# EAGLE board jr-support_v2 (EAGLE 8.2.0), part 1 of 2
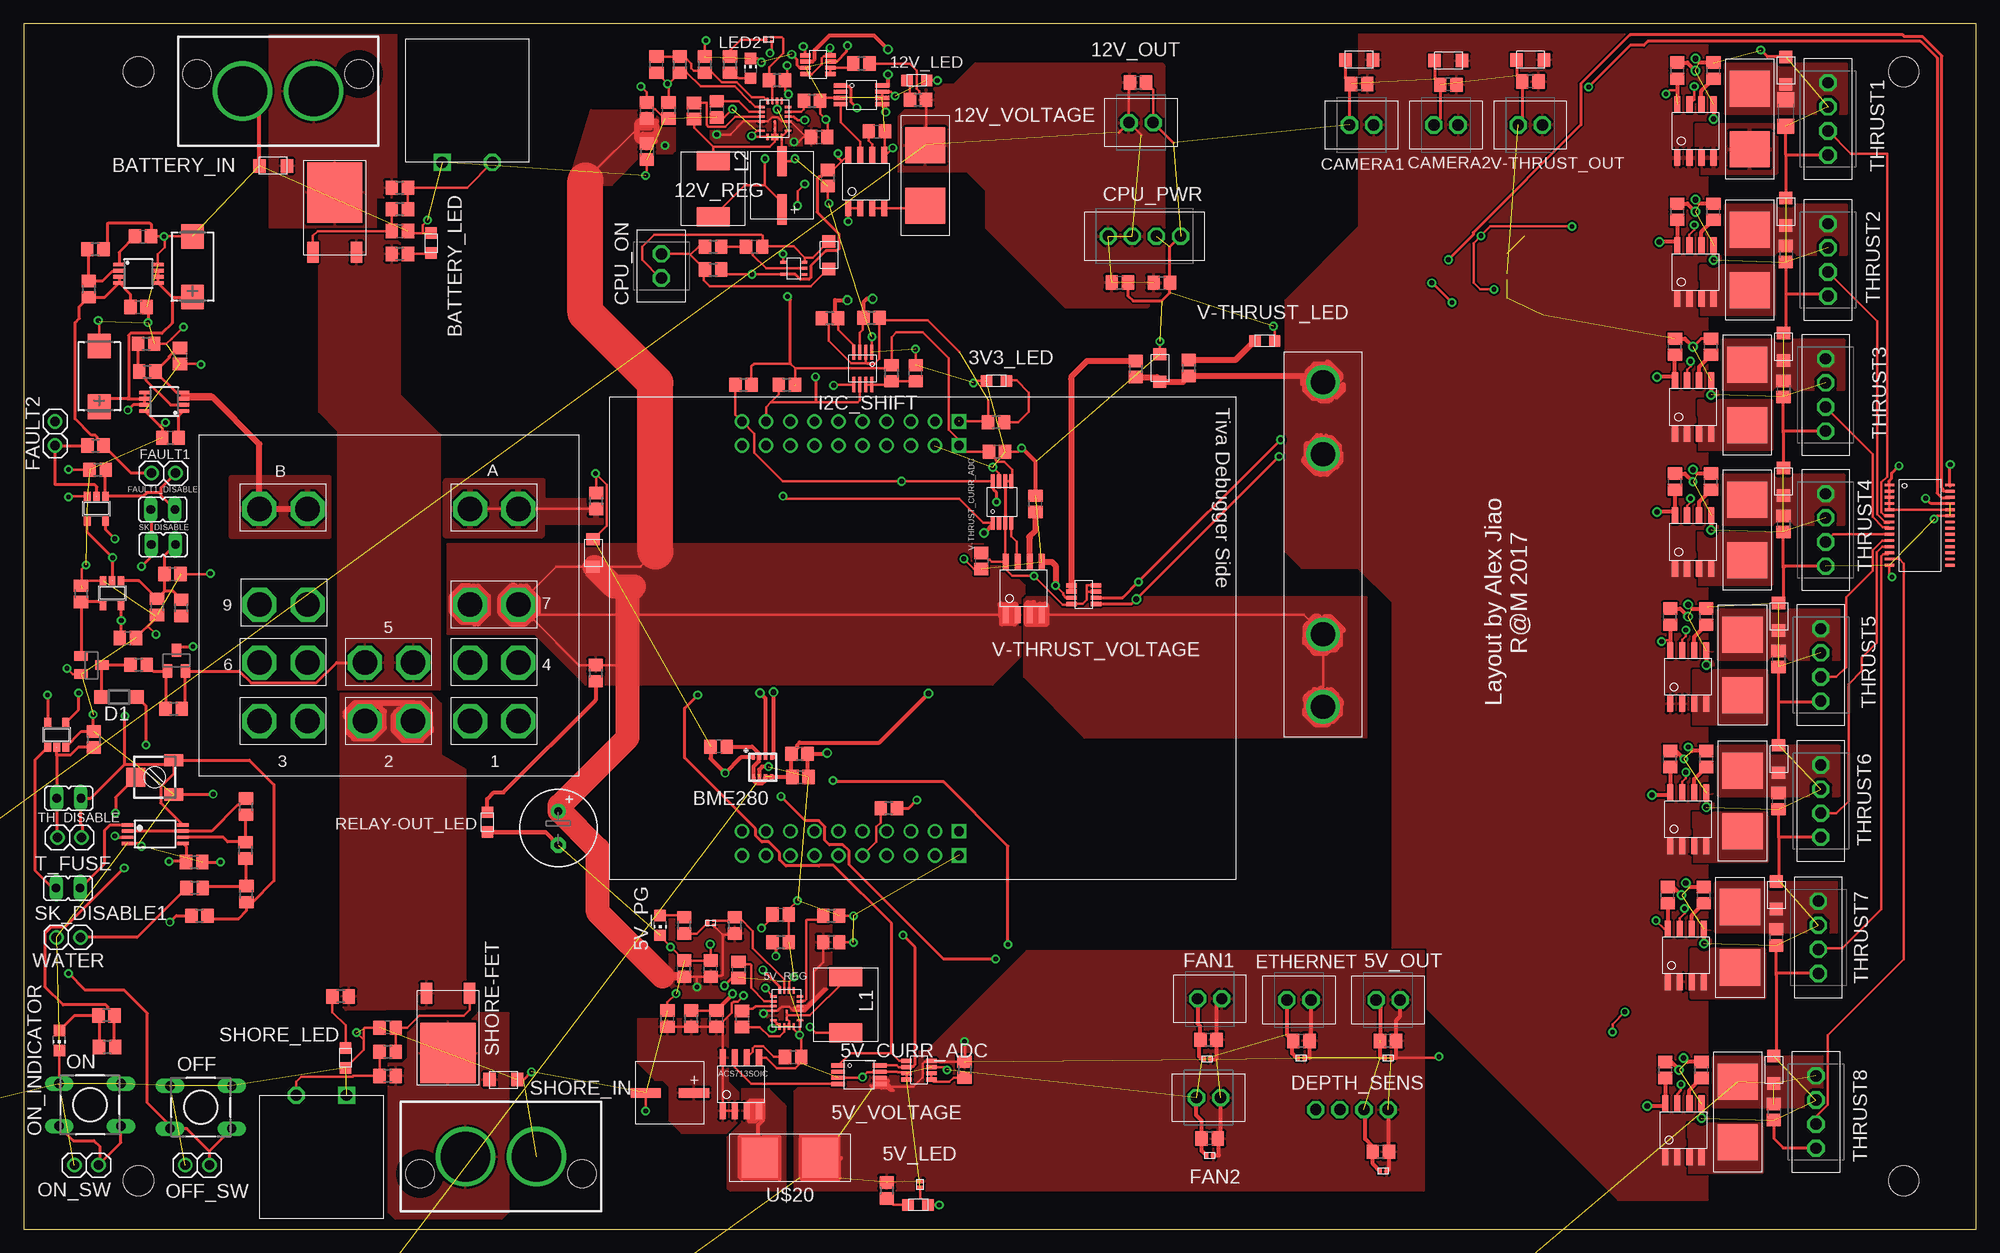
[diagram p0: board, top side]
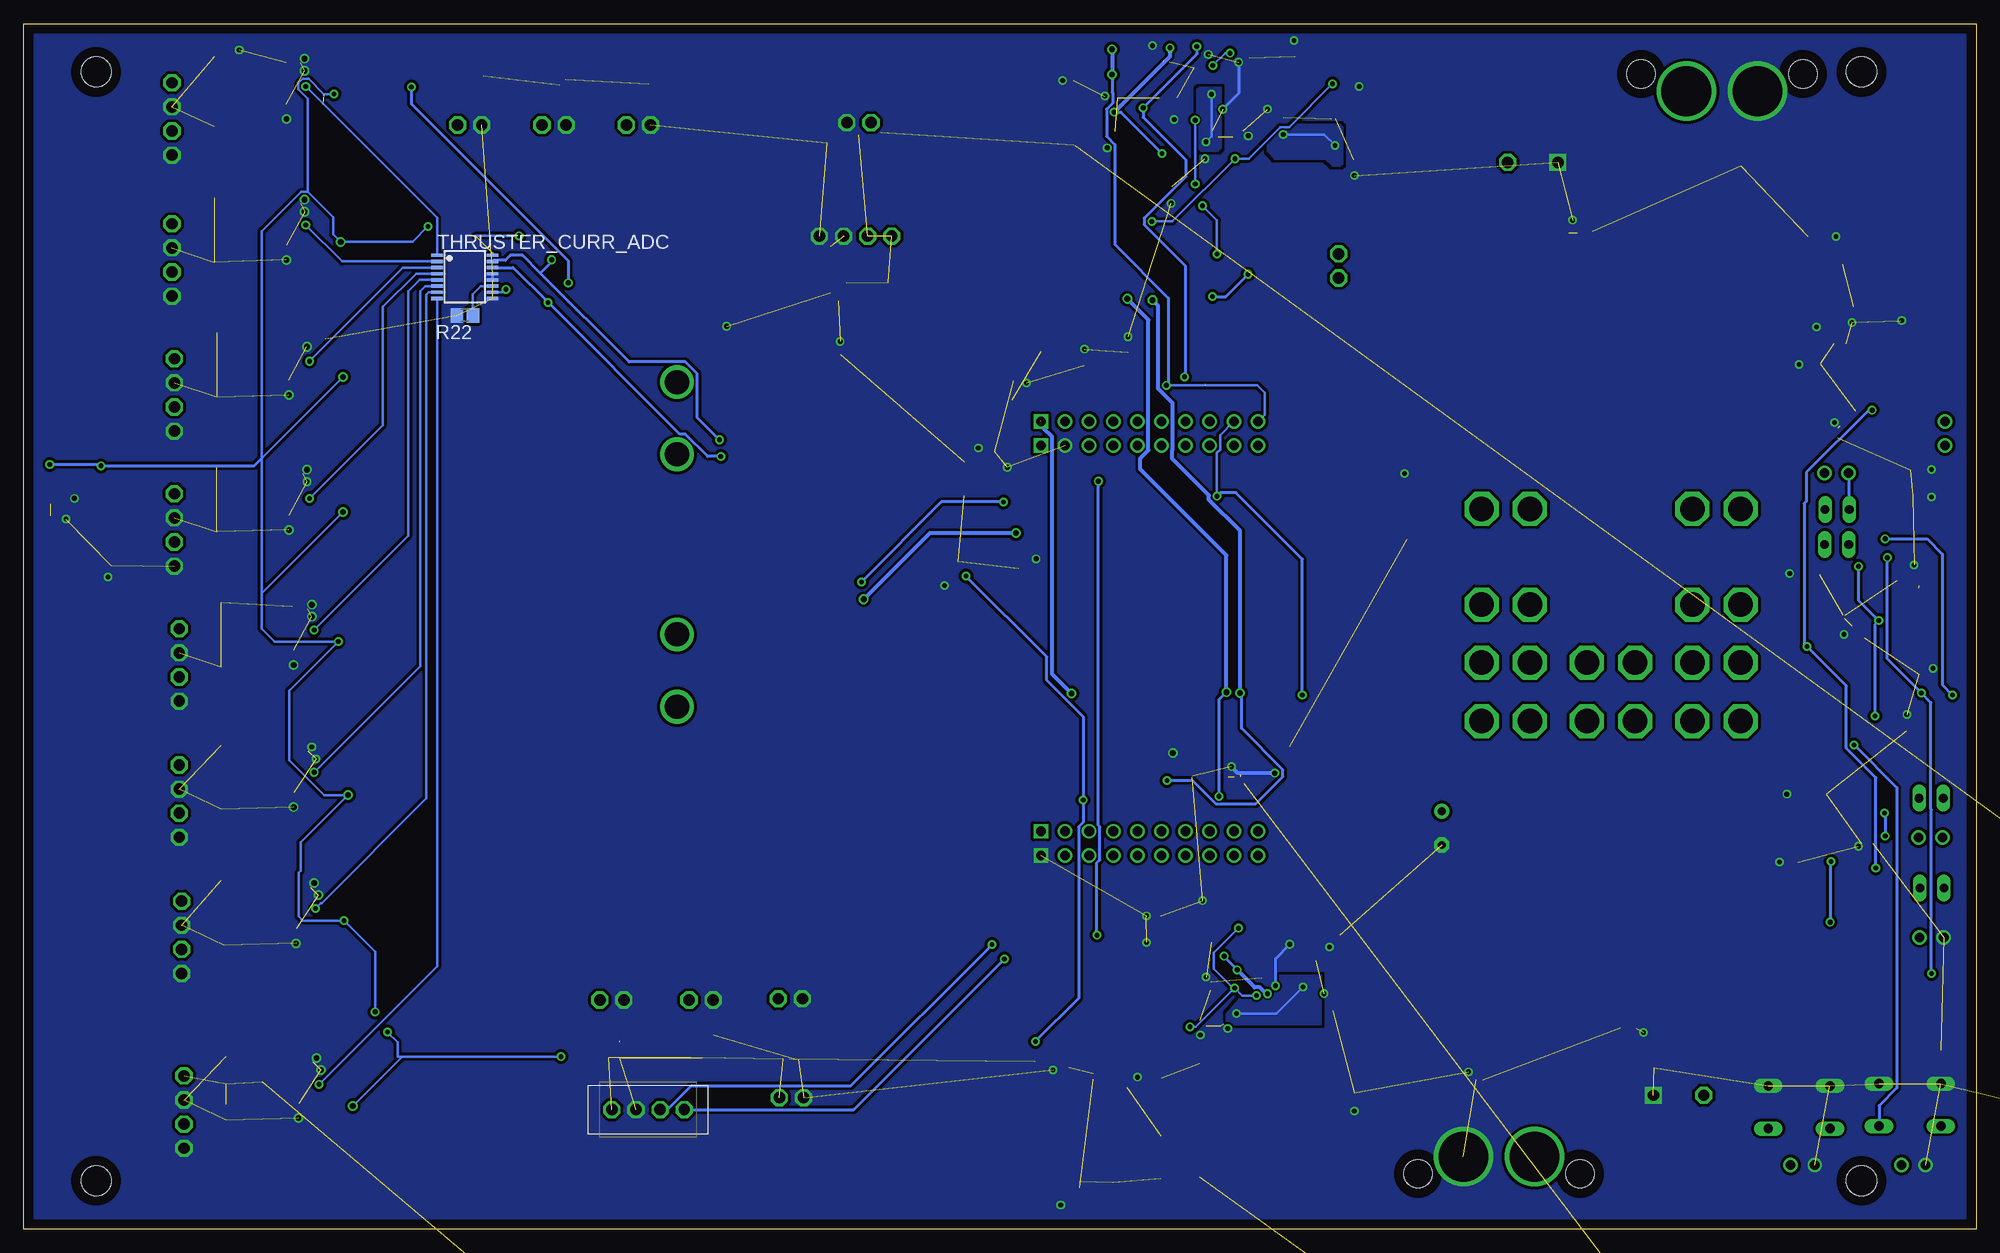
[diagram p1: board, bottom side, seen from below]

Size 205.74 x 127 mm. Coordinates in mm from the lower left corner, seen from the top.
Outline: 0,0 205.74,0 205.74,127 0,127 0,0
Copper layers (1*16): Top 0.035mm / dielectric 1.5mm / Bottom 0.035mm
Design rules "default": minimum track width 10mil, minimum drill 24mil, track to track 8mil, track to pad 8mil, pad to pad 8mil, via to via 8mil, smd to smd 8mil, copper to edge 40mil, drill to drill 8mil, minimum pad ring 10mil, minimum via ring 8mil, stop-mask expansion 4mil, vias tented up to drill 0mil, thermal gap 10mil
Holes 3.17 mm at 12.09,121.92 198.12,5.08 12.09,5.08 198.12,121.92

## Footprints (pad centres in the part's own frame; a part is rotated, then mirrored left to right if it is on the bottom)
0805 = smd 1.2 x 1.2: P$1 -1.05,0; P$2 1.05,0
VSSOP-8 = smd 0.45 x 1.45: P$1 -0.975,-2.2; P$2 -0.325,-2.2; P$3 0.325,-2.2; P$4 0.975,-2.2; P$5 0.975,2.2; P$6 0.325,2.2; P$7 -0.325,2.2; P$8 -0.975,2.2
KK254_VERT_2PIN = drill 1.2 octagon: P$1 1.27,0; P$2 -1.27,0
CHIP-LED0805 = smd 1.2 x 1.2: A 0,-1.05; C 0,1.05
QFN18-3X4 = smd 0.25 x 0.7: 1 1.25,1.4; 2 0.75,1.4; 3 0.25,1.4; 4 -0.25,1.4; 6 -1.25,1.4; 11 -1.25,-1.4; 13 -0.25,-1.4; 14 0.25,-1.4; 15 0.75,-1.4; 16 1.25,-1.4 | smd 0.7 x 0.25: 7 -1.9,0.75; 8 -1.9,0.25; 9 -1.9,-0.25; 10 -1.9,-0.75; 17 1.9,-0.75; 18 1.9,-0.25; 19 1.9,0.25; 20 1.9,0.75 | smd 0.4 x 0.22: 21 -1.075,0 | smd 0.356 x 0.22: 22 -0.305,0
SOT-23-8 = smd 0.45 x 1.1: P$1 -0.975,-1.3; P$2 -0.325,-1.3; P$3 0.325,-1.3; P$4 0.975,-1.3; P$5 0.975,1.3; P$6 0.325,1.3; P$7 -0.325,1.3; P$8 -0.975,1.3
SUPERSABRE_2CIRCUIT = drill 5.25: P$1 -3.747,0; P$2 3.747,0 | hole 2.997: -8.534,-1.803; 8.534,-1.803
BME280_LGA = smd 0.5 x 0.35: P$1 1.025,0.975; P$2 1.025,0.325; P$3 1.025,-0.325; P$4 1.025,-0.975; P$5 -1.025,-0.975; P$6 -1.025,-0.325; P$7 -1.025,0.325; P$8 -1.025,0.975
C0805 = smd 1.3 x 1.5: 1 -0.85,0; 2 0.85,0
C-F80 = smd 1 x 3.2: P$1 0,2.55; P$2 0,-2.53
C1206 = smd 1.6 x 1.8: 1 -1.4,0; 2 1.4,0
E3,5-8 = drill 0.813 pad 1.6: + -1.778,0 | drill 0.813 pad 1.6 octagon: - 1.778,0
CT7343 = smd 2.6 x 2.4: + 3.2,0; - -3.2,0
KK254_VERT_4PIN = drill 1.2 octagon: P$1 3.81,0; P$2 1.27,0; P$3 -1.27,0; P$4 -3.81,0
SOD123 = smd 1.4 x 1.4: A 1.9,0; C -1.9,0
1X02 = drill 1.016: 1 -1.27,0; 2 1.27,0
JP1 = drill 0.914 long: 1 0,-1.27; 2 0,1.27
SM8 = smd 0.3 x 1.6: P$1 -0.975,-1.7; P$2 -0.34,-1.7; P$3 0.295,-1.7; P$4 0.93,-1.7; P$5 0.93,1.7; P$6 0.295,1.7; P$7 -0.34,1.7; P$8 -0.975,1.7
SOT23-5 = smd 0.69 x 0.99: 1 -0.95,-1.29; 2 0,-1.29; 3 0.95,-1.29; 4 0.95,1.3; 5 -0.95,1.3
TSSOP8 = smd 1.2 x 0.35: 1 -2.925,0.975; 2 -2.925,0.325; 3 -2.925,-0.325; 4 -2.925,-0.975; 5 2.925,-0.975; 6 2.925,-0.325; 7 2.925,0.325; 8 2.925,0.975
L0740 = smd 2 x 3.5: P$1 -2.95,0; P$2 2.95,0
SOT23 = smd 1 x 1.4: 1 -0.95,-1.1; 2 0.95,-1.1; 3 0,1.1
DTS-6 = drill 1 long: 1 -3.25,2.25; 2 3.25,2.25; 3 -3.25,-2.25; 4 3.25,-2.25
R0805 = smd 1.3 x 1.5: 1 -0.85,0; 2 0.85,0
RTRIM3314J = smd 1.3 x 2: 1 -1.8,-2; 3 1.8,-2 | smd 2 x 2: 2 0,2
TO252-3 = smd 1.2 x 2.2: 1 -2.28,-6.3; 3 2.28,-6.3 | smd 5.8 x 6.4: TAB 0,0
TSSOP16 = smd 0.35 x 1.2: 1 -2.275,-2.925; 2 -1.625,-2.925; 3 -0.975,-2.925; 4 -0.325,-2.925; 5 0.325,-2.925; 6 0.975,-2.925; 7 1.625,-2.925; 8 2.275,-2.925; 9 2.275,2.925; 10 1.625,2.925; 11 0.975,2.925; 12 0.325,2.925; 13 -0.325,2.925; 14 -0.975,2.925; 15 -1.625,2.925; 16 -2.275,2.925
SOD-323 = smd 0.63 x 0.83: P$1 -1.115,0; P$2 1.115,0
TSSOP-28_4MM = smd 1 x 0.3: 1 -3.2,4.225; 2 -3.2,3.575; 3 -3.2,2.925; 4 -3.2,2.275; 5 -3.2,1.625; 6 -3.2,0.975; 7 -3.2,0.325; 8 -3.2,-0.325; 9 -3.2,-0.975; 10 -3.2,-1.625; 11 -3.2,-2.275; 12 -3.2,-2.925; 13 -3.2,-3.575; 14 -3.2,-4.225; 15 3.2,-4.225; 16 3.2,-3.575; 17 3.2,-2.925; 18 3.2,-2.275; 19 3.2,-1.625; 20 3.2,-0.975; 21 3.2,-0.325; 22 3.2,0.325; 23 3.2,0.975; 24 3.2,1.625; 25 3.2,2.275; 26 3.2,2.925; 27 3.2,3.575; 28 3.2,4.225
MSOP8 = smd 0.4 x 1.2: 1 -0.975,-2.05; 2 -0.325,-2.05; 3 0.325,-2.05; 4 0.975,-2.05; 5 0.975,2.05; 6 0.325,2.05; 7 -0.325,2.05; 8 -0.975,2.05
AP02002 = smd 0.4 x 0.25: P$1 -0.35,0.225; P$2 -0.35,-0.225 | smd 0.4 x 0.7: P$3 0.35,0
ACS713-SOIC = smd 0.65 x 1.75: P$1 -1.905,-2.8; P$2 -0.635,-2.8; P$3 0.635,-2.8; P$4 1.905,-2.8; P$5 1.905,2.8; P$6 0.635,2.8; P$7 -0.635,2.8; P$8 -1.905,2.8
TIVA-C_EVAL = drill 1.016 square: 1-1 -22.86,3.81; 2-1 22.86,3.81; 3-1 -20.32,3.81; 4-1 20.32,3.81 | drill 1.016: 1-2 -22.86,1.27; 1-3 -22.86,-1.27; 1-4 -22.86,-3.81; 1-5 -22.86,-6.35; 1-6 -22.86,-8.89; 1-7 -22.86,-11.43; 1-8 -22.86,-13.97; 1-9 -22.86,-16.51; 1-10 -22.86,-19.05; 2-2 22.86,1.27; 2-3 22.86,-1.27; 2-4 22.86,-3.81; 2-5 22.86,-6.35; 2-6 22.86,-8.89; 2-7 22.86,-11.43; 2-8 22.86,-13.97; 2-9 22.86,-16.51; 2-10 22.86,-19.05; 3-2 -20.32,1.27; 3-3 -20.32,-1.27; 3-4 -20.32,-3.81; 3-5 -20.32,-6.35; 3-6 -20.32,-8.89; 3-7 -20.32,-11.43; 3-8 -20.32,-13.97; 3-9 -20.32,-16.51; 3-10 -20.32,-19.05; 4-2 20.32,1.27; 4-3 20.32,-1.27; 4-4 20.32,-3.81; 4-5 20.32,-6.35; 4-6 20.32,-8.89; 4-7 20.32,-11.43; 4-8 20.32,-13.97; 4-9 20.32,-16.51; 4-10 20.32,-19.05
1.25"_FUSECLIPS = drill 2.54: P$1 -17.107,0; P$2 -9.487,0; P$3 9.487,0; P$4 17.107,0
154-OMNI-BLOK = smd 3.81 x 4.242: P$1 -3.188,0; P$2 3.188,0
DO-219AB = smd 1.3 x 1.4: P$1 -1.45,0; P$2 1.45,0
KUHP_6.35MM-QUICK-CONNECT = drill 2.57 octagon: 1A -13.64,6.17; 1B -8.56,6.17; 2A -2.54,6.17; 2B 2.54,6.17; 3A 8.56,6.17; 3B 13.64,6.17; 4A -13.64,0; 4B -8.56,0; 5A -2.54,0; 5B 2.54,0; 6A 8.56,0; 6B 13.64,0; 7A -13.64,-6.1; 7B -8.56,-6.1; 9A 8.56,-6.1; 9B 13.64,-6.1; AA -13.64,-16.18; AB -8.56,-16.18; BA 8.56,-16.18; BB 13.64,-16.18
TSSOP5 = smd 0.3 x 0.6: P$1 -0.65,-1.125; P$2 0,-1.125; P$3 0.65,-1.125; P$4 0.65,1.125; P$5 -0.62,1.125
X1-DFN1006-2 = smd 0.4 x 0.7: P$1 -0.35,0; P$2 0.35,0
GPTS203211B = drill 1.2 square: P$1 0,-2.65 | drill 1.2 octagon: P$2 0,2.65

## Placement (x,y rotation side)
3V3_LED  [0805]  102.49,89.37 180 top
5V_CURR_ADC  ADC121C021  [VSSOP-8]  88.01,16.26 270 top
5V_LED  [0805]  94.23,2.54 0 top
5V_OUT  5V_OUT  [KK254_VERT_2PIN]  143.76,24.13 0 top
5V_PG  [CHIP-LED0805]  67.06,32 180 top
5V_REG  LT8640  [QFN18-3X4]  80.39,23.24 90 top
5V_VOLTAGE  INA219SOT23  [SOT-23-8]  94.33,16.73 90 top
12V_CURR_ADC  ADC121C021  [VSSOP-8]  88.27,119.51 270 top
12V_LED  [0805]  94.11,121.03 0 top
12V_OUT  12V_OUT  [KK254_VERT_2PIN]  117.73,116.59 180 top
12V_REG  LT8640  [QFN18-3X4]  79.12,116.97 90 top
12V_VOLTAGE  INA219SOT23  [SOT-23-8]  83.69,122.68 90 top
BATTERY_IN  2_SUPERSABRE  [SUPERSABRE_2CIRCUIT]  26.8,119.89 180 top
BATTERY_LED  [0805]  42.93,103.89 90 top
BME280  BME280  [BME280_LGA]  77.85,48.67 90 top
C1  0.1u  [C0805]  84.71,110.74 270 top
C2  0.1u  [C0805]  79.76,33.15 0 top
C3  47n  [C0805]  81.08,18.13 0 top
C4  1u  [C0805]  65.66,113.54 270 top
C5  0.1u  [C0805]  174.24,122.05 90 top
C6  47n  [C0805]  178.05,122.05 90 top
C7  1u  [C0805]  -137.16,-482.6 0 top  (outside the outline)
C8  0.1u  [C0805]  174.24,107.19 90 top
C9  47n  [C0805]  178.05,107.19 90 top
C10  10u  [C0805]  185.67,102.74 270 top
C11  0.1u  [C0805]  173.99,92.96 90 top
C12  47n  [C0805]  177.8,92.96 90 top
C13  10u  [C0805]  185.42,88.52 270 top
C14  0.1u  [C0805]  173.99,78.74 90 top
C15  47n  [C0805]  177.8,78.74 90 top
C16  10u  [C0805]  185.42,74.3 270 top
C17  0.1u  [C0805]  173.48,64.52 90 top
C18  47n  [C0805]  177.29,64.52 90 top
C19  0.1u  [C0805]  100.9,70.4 270 top
C20  47n  [C0805]  106.62,76.41 90 top
C21  10u  [C0805]  184.91,60.07 270 top
C22  0.1u  [C0805]  173.48,49.53 90 top
C23  100p  [C0805]  93.98,90.17 90 top
C24  100n  [C0805]  81.84,47.62 0 top
C25  100n  [C0805]  81.74,50.09 0 top
C26  100n  [C0805]  73.23,50.83 180 top
C27  10u  [C0805]  65.66,117.86 90 top
C28  15p  [C0805]  66.67,122.68 90 top
C29  47n  [C0805]  177.29,49.53 90 top
C30  10u  [C0805]  184.91,45.08 270 top
C31  47n  [C0805]  89.9,115.66 0 top
C32  1u  [C0805]  76.96,103.5 0 top
C33  0.1u  [C0805]  173.23,35.18 90 top
C34  1u  [C0805]  83.82,115.06 0 top
C35  22u  [C0805]  67.94,117.86 270 top
C36  220u  [C-F80]  79.88,109.98 180 top
C37  47n  [C0805]  177.04,35.18 90 top
C38  1u  [C0805]  72.39,27.43 90 top
C39  1u  [C0805]  73.02,117.98 270 top
C40  10u  [C0805]  69.6,27.43 90 top
C41  0.1u  [C0805]  70.63,117.81 270 top
C42  15p  [C0805]  72.99,22.17 90 top
C43  [C0805]  143,8.13 180 top
C44  1n  [C0805]  119.93,99.69 0 top
C45  1n  [C0805]  115.5,99.74 0 top
C46  [C0805]  140.72,120.65 180 top
C47  [C0805]  150.11,120.57 180 top
C48  [C0805]  134.62,19.81 180 top
C49  [C0805]  158.75,120.9 180 top
C50  [C0805]  117.4,120.81 0 top
C51  [C0805]  143.76,19.81 180 top
C52  0.1u  [C0805]  -137.16,-254 0 top  (outside the outline)
C53  4.7u  [C0805]  102.55,81.91 0 top
C54  10u  [C1206]  185.67,117.6 270 top
C55  10u  [C0805]  184.66,30.73 270 top
C56  0.1u  [C0805]  172.97,16.76 90 top
C57  47n  [C0805]  176.78,16.76 90 top
C58  10u  [C0805]  184.4,12.32 270 top
C59  100u  [E3,5-8]  56.33,42.24 270 top
C60  1u  [C0805]  85.09,30.23 0 top
C61  22u  [C0805]  67.82,22.17 90 top
C62  220u  [C-F80]  68.07,14.35 270 top
C63  1u  [C0805]  75.31,27.3 270 top
C64  2.2u  [C0805]  39.62,105.16 0 top
C65  0.1u  [C0805]  75.69,22.13 270 top
C66  2.2u  [C0805]  38.35,21.21 180 top
C67  [C0805]  124.84,19.94 180 top
C68  [C0805]  124.97,9.52 180 top
C69  100nF  [C0805]  10.97,62.28 0 top
C70  10nF  [C0805]  12.57,104.6 0 top
C71  100nF  [C0805]  12.09,97.16 0 top
C72  T491D475K050AT  [CT7343]  17.78,101.4 270 top
C73  100nF  [C0805]  15.67,69.01 0 top
C74  10nF  [C0805]  15.44,83.36 180 top
C75  100nF  [C0805]  16.46,92 270 top
C76  T491D475K050AT  [CT7343]  7.95,89.84 270 top
C77  0.1u  [C0805]  -137.16,-50.8 0 top  (outside the outline)
C78  4.7u  [C0805]  -137.16,-76.2 0 top  (outside the outline)
C79  0.1u  [C0805]  -137.16,-101.6 0 top  (outside the outline)
C80  4.7u  [C0805]  -137.16,-127 0 top  (outside the outline)
C81  0.1u  [C0805]  -137.16,-152.4 0 top  (outside the outline)
C82  1n  [C0805]  -137.16,-177.8 0 top  (outside the outline)
C83  4.7u  [C0805]  -137.16,-203.2 0 top  (outside the outline)
C84  0.1u  [C0805]  -111.76,-203.2 0 top  (outside the outline)
C85  1n  [C0805]  -137.16,-228.6 0 top  (outside the outline)
C86  0.1u  [C0805]  -137.16,-279.4 0 top  (outside the outline)
C87  0.1u  [C0805]  -137.16,-304.8 0 top  (outside the outline)
C88  0.1u  [C0805]  -137.16,-330.2 0 top  (outside the outline)
C89  0.1u  [C0805]  -137.16,-355.6 0 top  (outside the outline)
C90  0.1u  [C0805]  -137.16,-381 0 top  (outside the outline)
C91  0.1u  [C0805]  -137.16,-406.4 0 top  (outside the outline)
C92  0.1u  [C0805]  -137.16,-431.8 0 top  (outside the outline)
C93  1u  [C0805]  -137.16,-457.2 0 top  (outside the outline)
C94  1u  [C0805]  -137.16,-508 0 top  (outside the outline)
C95  1u  [C0805]  -137.16,-533.4 0 top  (outside the outline)
C96  1u  [C0805]  -137.16,-558.8 0 top  (outside the outline)
C97  1u  [C0805]  -137.16,-584.2 0 top  (outside the outline)
C98  1u  [C0805]  -137.16,-609.6 0 top  (outside the outline)
C99  1u  [C0805]  -137.16,-635 0 top  (outside the outline)
C100  1u  [C0805]  -137.16,-660.4 0 top  (outside the outline)
C101  1u  [C0805]  -137.16,-685.8 0 top  (outside the outline)
C102  1u  [C0805]  -137.16,-711.2 0 top  (outside the outline)
CAMERA1  KK254_VERT_2PIN22-29-2021  [KK254_VERT_2PIN]  140.97,116.33 0 top
CAMERA2  KK254_VERT_2PIN22-29-2021  [KK254_VERT_2PIN]  149.86,116.33 0 top
CPU_ON  KK254_VERT_2PIN22-29-2021  [KK254_VERT_2PIN]  67.18,101.47 90 top
CPU_PWR  CPU PWR  [KK254_VERT_4PIN]  118.09,104.62 0 top
D1  MMSD4148  [SOD123]  10.03,56.06 180 top
DEPTH_SENS  Depth Sensor  [KK254_VERT_4PIN]  139.95,12.57 0 bottom
ETHERNET  KK254_VERT_2PIN22-29-2021  [KK254_VERT_2PIN]  134.37,24.13 0 top
FAN1  KK254_VERT_2PIN22-29-2021  [KK254_VERT_2PIN]  124.97,24.26 0 top
FAN2  Ethernet switch pwr  [KK254_VERT_2PIN]  124.84,13.84 0 top
FAULT1  [1X02]  14.73,79.65 0 top
FAULT1_DISABLE  [JP1]  14.66,75.82 90 top
FAULT2  [1X02]  3.3,83.82 90 top
I2C_SHIFT  [SM8]  88.39,90.68 180 top
IC1  74LVC1G08DBV  [SOT23-5]  3.48,52.07 0 top
IC2  TLC2272PW  [TSSOP8]  13.84,41.61 0 top
IC3  74LVC1G08DBV  [SOT23-5]  9.32,67.01 180 top
IC4  74LVC1G08DBV  [SOT23-5]  7.65,75.9 180 top
L1  2.2u  [L0740]  86.61,23.62 270 top
L2  2.2u  [L0740]  72.64,109.6 270 top
LED2  FASTCHG  [CHIP-LED0805]  76.58,122.3 0 top
N1  2N7002  [SOT23]  7.14,59.41 270 top
OFF  DTS-6  [DTS-6]  18.67,12.83 0 top
OFF_SW  [1X02]  18.29,6.73 180 top
ON  DTS-6  [DTS-6]  6.98,13.08 0 top
ON_INDICATOR  Green  [CHIP-LED0805]  3.76,19.86 180 top
ON_SW  [1X02]  6.6,6.73 180 top
Q1  FDN5618P  [SOT23]  16.08,59.89 0 top
R1  10k  [R0805]  91.16,44.33 0 top
R2  1.2k  [R0805]  69.6,32 270 top
R3  50k  [R0805]  74.93,32 270 top
R7  4.7k  [R0805]  75.83,88.97 0 top
R8  4.7k  [R0805]  80.41,88.97 0 top
R10  4.2k  [R0805]  84.94,95.97 180 top
R11  4.2k  [R0805]  89.33,96.03 0 top
R12  200k  [R0805]  91.44,90.17 90 top
R14  41.2k  [R0805]  83.06,118.87 180 top
R15  1M  [R0805]  69.12,122.68 270 top
R16  88.7k  [R0805]  71.75,122.68 270 top
R17  41.2k  [R0805]  85.09,33.02 180 top
R18  510  [R0805]  72.64,103.5 0 top
R19  10k  [R0805]  60.33,76.71 90 top
R20  1.5k  [R0805]  60.27,58.56 90 top
R21  6.8k  [R0805]  72.64,101.09 0 top
R22  0  [R0805]  159.26,96.27 180 bottom
R23  1M  [R0805]  70.33,22.17 270 top
R24  243k  [R0805]  79.76,30.23 180 top
R25  10  [R0805]  88.27,122.81 180 top
R26  43k  [R0805]  39.62,107.44 0 top
R27  4.3k  [R0805]  39.62,109.73 0 top
R29  1.5k  [R0805]  39.62,102.74 180 top
R30  10  [R0805]  117.18,90.62 90 top
R31  270  [R0805]  90.93,4.06 90 top
R32  1.5k  [R0805]  122.75,90.72 270 top
R33  1.2k  [R0805]  94.23,119 0 top
R34  68  [R0805]  102.46,85 180 top
R35  10  [R0805]  99.13,16.78 270 top
R36  43k  [R0805]  38.35,18.67 180 top
R37  4.3k  [R0805]  38.35,16.13 180 top
R38  1.2k  [R0805]  74.42,122.68 90 top
R39  1.5k  [R0805]  33.4,24.51 0 top
R40  50k  [R0805]  79.38,121.03 0 top
R41  10k  [R0805]  15.8,54.81 0 top
R42  10k  [R0805]  12.12,59.46 180 top
R43  845k  [R0805]  6.86,99.03 270 top
R44  115k  [R0805]  7.54,103.23 180 top
R45  10k  [R0805]  16.61,65.46 270 top
R46  1M  [R0805]  14.05,65.56 90 top
R47  3.3k  [R0805]  8.79,19.18 0 top
R48  3.3k  [R0805]  8.71,22.5 0 top
R49  1M  [R0805]  13.03,90.35 0 top
R50  115k  [R0805]  12.9,93.27 180 top
R51  1M  [R0805]  7.39,51.59 270 top
R52  100k  [R0805]  23.42,44.5 270 top
R53  10k  [R0805]  6.05,66.93 270 top
R54  10k  [R0805]  23.37,39.9 270 top
R55  100k  [R0805]  23.47,35.28 90 top
R56  470  [R0805]  18.01,35.94 180 top
R57  100k  [R0805]  18.52,33.02 0 top
R58  100k  [R0805]  17.96,38.66 180 top
R59  [RTRIM3314J]  13.79,47.6 90 top
R60  1M  [R0805]  7.8,80.01 0 top
R61  50k  [R0805]  7.57,82.55 0 top
RELAY-OUT_LED  [0805]  48.85,42.86 270 top
SHORE-FET  IPD50P04P4-13  [TO252-3]  44.7,18.54 180 top
SHORE_IN  2_SUPERSABRE  [SUPERSABRE_2CIRCUIT]  50.29,7.62 0 top
SHORE_LED  [0805]  33.91,18.03 270 top
SK_DISABLE  [JP1]  14.71,72.11 90 top
SK_DISABLE1  [JP1]  4.67,35.92 90 top
T_FUSE  [1X02]  4.83,41.25 180 top
TH_DISABLE  [JP1]  4.75,45.39 270 top
THRUST1  KK254_VERT_4PIN22-29-2041  [KK254_VERT_4PIN]  190.12,116.97 270 top
THRUST2  KK254_VERT_4PIN22-29-2041  [KK254_VERT_4PIN]  190.12,102.11 270 top
THRUST3  KK254_VERT_4PIN22-29-2041  [KK254_VERT_4PIN]  189.87,87.88 270 top
THRUST4  KK254_VERT_4PIN22-29-2041  [KK254_VERT_4PIN]  189.87,73.66 270 top
THRUST5  KK254_VERT_4PIN22-29-2041  [KK254_VERT_4PIN]  189.36,59.44 270 top
THRUST6  KK254_VERT_4PIN22-29-2041  [KK254_VERT_4PIN]  189.36,45.08 270 top
THRUST7  KK254_VERT_4PIN22-29-2041  [KK254_VERT_4PIN]  189.1,30.73 270 top
THRUST8  KK254_VERT_4PIN22-29-2041  [KK254_VERT_4PIN]  188.85,12.32 270 top
THRUSTER_CURR_ADC  ADS7828  [TSSOP16]  159.26,100.33 270 bottom
TVS1  [SOD-323]  -60.96,0 0 top  (outside the outline)
TVS2  [SOD-323]  -86.36,0 0 top  (outside the outline)
TVS3  [SOD-323]  -111.76,0 0 top  (outside the outline)
TVS4  [SOD-323]  -137.16,0 0 top  (outside the outline)
U1  PCA9685  [TSSOP-28_4MM]  199.77,74.17 0 top
U2  LT3063  [MSOP8]  12.09,100.66 270 top
U3  LT3063  [MSOP8]  14.81,87.17 90 top
U$1  DMP32D5SFB  [AP02002]  72.39,32.26 180 top
U$2  ACS713SOIC  [ACS713-SOIC]  75.56,15.24 0 top
U$3  TIVA-C_EVAL  [TIVA-C_EVAL]  94.74,62.23 270 top
U$4  ACS713SOIC  [ACS713-SOIC]  176.15,115.7 0 top
U$5  25A Fuse  [1.25"_FUSECLIPS]  136.91,72.14 90 top
U$6  4A Fuse  [154-OMNI-BLOK]  181.86,116.97 90 top
U$8  ACS713SOIC  [ACS713-SOIC]  176.15,100.84 0 top
U$9  4A Fuse  [154-OMNI-BLOK]  181.86,102.11 90 top
U$10  VTVS  [DO-219AB]  184.4,16.76 270 top
U$11  ACS713SOIC  [ACS713-SOIC]  175.9,86.61 0 top
U$12  4A Fuse  [154-OMNI-BLOK]  181.61,87.88 90 top
U$13  VTVS  [DO-219AB]  184.91,49.53 270 top
U$14  ACS713SOIC  [ACS713-SOIC]  175.9,72.39 0 top
U$15  4A Fuse  [154-OMNI-BLOK]  181.61,73.66 90 top
U$16  VTVS  [DO-219AB]  184.66,35.18 270 top
U$17  ACS713SOIC  [ACS713-SOIC]  175.39,58.17 0 top
U$18  4A Fuse  [154-OMNI-BLOK]  181.1,59.44 90 top
U$19  ACS713SOIC  [ACS713-SOIC]  105.37,67.5 0 top
U$20  4A Fuse  [154-OMNI-BLOK]  80.74,7.5 0 top
U$22  VTVS  [DO-219AB]  184.91,64.52 270 top
U$23  ACS713SOIC  [ACS713-SOIC]  175.39,43.18 0 top
U$25  KUHP-5XX1-XX  [KUHP_6.35MM-QUICK-CONNECT]  38.48,59.69 180 top
U$26  VTVS  [DO-219AB]  185.42,92.96 270 top
U$27  4A Fuse  [154-OMNI-BLOK]  181.1,45.08 90 top
U$28  VTVS  [DO-219AB]  185.42,78.74 270 top
U$29  ACS713SOIC  [ACS713-SOIC]  175.13,28.83 0 top
U$30  VTVS  [DO-219AB]  185.67,107.19 270 top
U$31  VTVS  [DO-219AB]  185.67,122.05 270 top
U$32  VTVS  [DO-219AB]  140.72,123.19 0 top
U$33  VTVS  [DO-219AB]  150.11,123.11 0 top
U$34  VTVS  [DO-219AB]  158.75,123.19 0 top
U$35  ACS713SOIC  [ACS713-SOIC]  88.77,110.36 0 top
U$36  4A Fuse  [154-OMNI-BLOK]  95,111 90 top
U$37  4A Fuse  [154-OMNI-BLOK]  180.85,30.73 90 top
U$38  VTVS  [DO-219AB]  119.7,90.72 270 top
U$39  ACS713SOIC  [ACS713-SOIC]  174.88,10.41 0 top
U$40  4A Fuse  [154-OMNI-BLOK]  180.59,12.32 90 top
U$45  74LVC1G14  [TSSOP5]  81.15,101.22 90 top
U$50  VTVS  [DO-219AB]  59.99,71.23 270 top
U$51  DESD  [X1-DFN1006-2]  134.62,18.03 0 top
U$52  DESD  [X1-DFN1006-2]  143.26,6.1 0 top
U$53  DESD  [X1-DFN1006-2]  143.76,18.03 0 top
U$54  DESD  [X1-DFN1006-2]  94.46,4.69 90 top
U$57  VTVS  [DO-219AB]  50.55,15.75 180 top
U$59  VTVS  [DO-219AB]  84.84,102.62 270 top
U$60  VTVS  [DO-219AB]  26.29,112.01 0 top
U$61  IPD50P04P4-13  [TO252-3]  32.77,109.22 0 top
U$62  GPTS203212B  [GPTS203211B]  46.74,112.4 270 top
U$63  GPTS203212B  [GPTS203211B]  31.37,14.1 90 top
U$64  DESD  [X1-DFN1006-2]  124.71,17.91 0 top
U$65  DESD  [X1-DFN1006-2]  124.97,7.75 0 top
U$66  DMP32D5SFB  [AP02002]  78.49,125.35 180 top
V-THRUST_CURR_ADC  ADC121C021  [VSSOP-8]  103.09,76.59 0 top
V-THRUST_LED  [0805]  130.77,93.59 0 top
V-THRUST_OUT  Vin_OUT  [KK254_VERT_2PIN]  158.75,116.33 0 top
V-THRUST_VOLTAGE  INA219SOT23  [SOT-23-8]  111.7,66.84 270 top
WATER  [1X02]  4.7,30.73 180 top

## Library data of the parts
3V3_LED 5V_LED 5V_PG 12V_LED BATTERY_LED LED2 ON_INDICATOR RELAY-OUT_LED SHORE_LED V-THRUST_LED = led
5V_CURR_ADC 5V_VOLTAGE 12V_CURR_ADC 12V_VOLTAGE I2C_SHIFT IC2 THRUSTER_CURR_ADC U$3 V-THRUST_CURR_ADC V-THRUST_VOLTAGE = texas
5V_OUT 12V_OUT BATTERY_IN CAMERA1 CAMERA2 CPU_ON CPU_PWR DEPTH_SENS ETHERNET FAN1 FAN2 SHORE_IN THRUST1-THRUST8 V-THRUST_OUT = molex
5V_REG 12V_REG U2 U3 = linear
BME280 = BME280ComponentLibrary; PROD_ID: IC-13090
C1-C102 L1 L2 R1-R3 R7 R8 R10-R12 R14-R27 R29-R61 = resistor
D1 TVS1-TVS4 U$10 U$13 U$16 U$22 U$26 U$28 U$30-U$34 U$38 U$50-U$54 U$57 U$59 U$60 U$64 U$65 = diode
FAULT1 FAULT2 OFF_SW ON_SW T_FUSE WATER = pinhead
FAULT1_DISABLE SK_DISABLE SK_DISABLE1 TH_DISABLE = jumper
IC1 IC3 IC4 = 74xx-little-us
N1 Q1 U$1 U$66 = transistor-fet
OFF ON = switch-tact
SHORE-FET U$61 = transistor-power
U1 = NXP; PROD_ID: IC-12240
U$2 U$4 U$8 U$11 U$14 U$17 U$19 U$23 U$29 U$35 U$39 = allegro
U$5 U$6 U$9 U$12 U$15 U$18 U$20 U$27 U$36 U$37 U$40 = littelfuse
U$25 = TE
U$45 = NXP
U$62 U$63 = switches

## Nets
3V3: BME280.P$2 BME280.P$5 BME280.P$6 BME280.P$8 C24.1 C25.1 C26.1 C83.1 C84.1 C85.1 C101.1 C102.1 I2C_SHIFT.P$2 R10.2 R11.2 R34.2 U$3.1-1
5V: 5V_CURR_ADC.P$5 5V_CURR_ADC.P$6 5V_OUT.P$1 5V_VOLTAGE.P$4 12V_CURR_ADC.P$5 12V_VOLTAGE.P$4 12V_VOLTAGE.P$8 C1.1 C5.1 C7.1 C8.1 C11.1 C14.1 C17.1 C19.1 C22.1 C33.1 C43.1 C48.1 C51.1 C53.1 C56.1 C67.1 C68.1 C81.1 C82.1 C93.1 C94.1 C95.1 C96.1 C97.1 C98.1 C99.1 C100.1 DEPTH_SENS.P$4 ETHERNET.P$1 FAN1.P$1 FAN2.P$1 R1.2 R7.2 R8.2 R12.2 R21.2 R31.2 R35.1 THRUSTER_CURR_ADC.10 THRUSTER_CURR_ADC.16 U1.1 U1.2 U1.3 U1.4 U1.5 U1.24 U1.28 U$3.3-1 U$4.P$8 U$8.P$8 U$11.P$8 U$14.P$8 U$17.P$8 U$19.P$8 U$20.P$2 U$23.P$8 U$29.P$8 U$35.P$8 U$39.P$8 U$45.P$5 U$51.P$2 U$52.P$2 U$53.P$2 U$54.P$2 U$64.P$2 U$65.P$2 V-THRUST_CURR_ADC.P$3 V-THRUST_CURR_ADC.P$5 V-THRUST_CURR_ADC.P$6 V-THRUST_VOLTAGE.P$4 V-THRUST_VOLTAGE.P$7 V-THRUST_VOLTAGE.P$8
5V_PG: FAULT2.2
12V: 12V_OUT.P$1 C44.1 C45.1 C50.1 C77.1 C78.1 C79.1 C80.1 CPU_PWR.P$3 CPU_PWR.P$4 R25.1 R33.2 TVS1.P$1 TVS2.P$1 TVS3.P$1 TVS4.P$1 U$36.P$2
+5V: C69.1 C71.1 FAULT1.1 FAULT1_DISABLE.2 IC2.8 IC3.5 R43.2 R55.1 R57.2 R59.3 R61.2 SK_DISABLE.2 T_FUSE.1 TH_DISABLE.2 U2.3 U2.4
AIN0: U$3.3-9
AIN1: U$3.3-8
AIN2: U$3.3-7
AIN3: U$3.2-3
AIN4: U$3.3-6
AIN5: U$3.3-5
AIN8: U$3.1-6
AIN9: U$3.1-5
AIN10: U$3.1-7
AIN11: U$3.1-2
CPU_ON: 12V_REG.14 U$45.P$4
FAULT: IC1.4 IC3.2 IC4.4 OFF.3 OFF.4 OFF_SW.1
FET: IC3.4 N1.1 R53.2
GND: 3V3_LED.P$2 5V_CURR_ADC.P$3 5V_CURR_ADC.P$7 5V_LED.P$2 5V_OUT.P$2 5V_PG.C 5V_REG.6 5V_REG.7 5V_REG.10 5V_REG.11 5V_REG.18 5V_VOLTAGE.P$3 5V_VOLTAGE.P$7 5V_VOLTAGE.P$8 12V_CURR_ADC.P$3 12V_CURR_ADC.P$6 12V_CURR_ADC.P$7 12V_LED.P$2 12V_OUT.P$2 12V_REG.6 12V_REG.7 12V_REG.10 12V_REG.11 12V_REG.18 12V_VOLTAGE.P$3 12V_VOLTAGE.P$7 BATTERY_IN.P$2 BATTERY_LED.P$2 BME280.P$1 BME280.P$7 C1.2 C2.2 C3.2 C4.2 C5.2 C6.2 C7.2 C8.2 C9.2 C10.2 C11.2 C12.2 C13.2 C14.2 C15.2 C16.2 C17.2 C18.2 C19.2 C20.2 C21.2 C22.2 C23.2 C24.2 C25.2 C26.2 C27.2 C29.2 C30.2 C31.2 C33.2 C34.2 C35.2 C36.P$2 C37.2 C38.2 C39.2 C40.2 C43.2 C44.2 C45.2 C46.2 C47.2 C48.2 C49.2 C50.2 C51.2 C52.2 C53.2 C54.2 C55.2 C56.2 C57.2 C58.2 C59.- C60.2 C61.2 C62.P$2 C63.2 C64.2 C66.2 C67.2 C68.2 C69.2 C70.2 C71.2 C72.- C73.2 C74.2 C75.2 C76.- C77.2 C78.2 C79.2 C80.2 C81.2 C82.2 C83.2 C84.2 C85.2 C86.2 C87.2 C88.2 C89.2 C90.2 C91.2 C92.2 C93.2 C94.2 C95.2 C96.2 C97.2 C98.2 C99.2 C100.2 C101.2 C102.2 CAMERA1.P$2 CAMERA2.P$2 CPU_PWR.P$1 CPU_PWR.P$2 DEPTH_SENS.P$3 ETHERNET.P$2 FAN1.P$2 FAN2.P$2 I2C_SHIFT.P$1 IC1.3 IC2.4 IC3.3 IC4.3 LED2.C N1.2 OFF.1 OFF.2 OFF_SW.2 ON.1 ON.2 ON_INDICATOR.C ON_SW.2 R14.1 R16.1 R17.1 R19.2 R22.2 R24.1 R44.1 R46.1 R50.1 R51.1 R53.1 R58.1 R59.1 R60.1 RELAY-OUT_LED.P$2 SHORE_IN.P$2 SHORE_LED.P$2 THRUST1.P$1 THRUST1.P$3 THRUST2.P$1 THRUST2.P$3 THRUST3.P$1 THRUST3.P$3 THRUST4.P$1 THRUST4.P$3 THRUST5.P$1 THRUST5.P$3 THRUST6.P$1 THRUST6.P$3 THRUST7.P$1 THRUST7.P$3 THRUST8.P$1 THRUST8.P$3 THRUSTER_CURR_ADC.9 THRUSTER_CURR_ADC.12 THRUSTER_CURR_ADC.13 TVS1.P$2 TVS2.P$2 TVS3.P$2 TVS4.P$2 U1.14 U1.23 U1.25 U2.8 U3.8 U$2.P$5 U$3.2-1 U$3.3-2 U$4.P$5 U$8.P$5 U$10.P$1 U$11.P$5 U$13.P$1 U$14.P$5 U$16.P$1 U$17.P$5 U$19.P$5 U$22.P$1 U$23.P$5 U$26.P$1 U$28.P$1 U$29.P$5 U$30.P$1 U$31.P$1 U$32.P$1 U$33.P$1 U$34.P$1 U$35.P$5 U$38.P$1 U$39.P$5 U$50.P$1 U$51.P$1 U$52.P$1 U$53.P$1 U$54.P$1 U$57.P$1 U$60.P$1 U$62.P$1 U$63.P$1 U$64.P$1 U$65.P$1 V-THRUST_CURR_ADC.P$7 V-THRUST_LED.P$2 V-THRUST_OUT.P$2 V-THRUST_VOLTAGE.P$3 WATER.2
N$1: 12V_REG.15 R14.2
N$2: R1.1 U$3.2-5
N$3: FAULT2.1 IC4.2 R61.1
N$4: 5V_PG.A R2.1
N$5: R2.2 U$1.P$3
N$6: 5V_REG.19 R3.1 U$1.P$2
N$7: 12V_REG.1 C28.1 C35.1 C36.P$1 L2.P$2 R15.2 U$35.P$1 U$35.P$2
N$8: 5V_REG.15 R17.2
N$11: C3.1 U$2.P$6
N$12: C9.1 U$8.P$6
N$13: C6.1 U$4.P$6
N$14: C54.1 THRUST1.P$4 U$6.P$2 U$31.P$2
N$15: U$4.P$3 U$4.P$4 U$6.P$1
N$16: C10.1 THRUST2.P$4 U$9.P$2 U$30.P$2
N$17: U$8.P$3 U$8.P$4 U$9.P$1
N$18: C12.1 U$11.P$6
N$19: C13.1 THRUST3.P$4 U$12.P$2 U$26.P$2
N$20: U$11.P$3 U$11.P$4 U$12.P$1
N$21: C15.1 U$14.P$6
N$22: C16.1 THRUST4.P$4 U$15.P$2 U$28.P$2
N$23: R22.1 THRUSTER_CURR_ADC.11
N$24: U$14.P$3 U$14.P$4 U$15.P$1
N$25: C18.1 U$17.P$6
N$26: C21.1 THRUST5.P$4 U$18.P$2 U$22.P$2
N$27: U$17.P$3 U$17.P$4 U$18.P$1
N$28: C29.1 U$23.P$6
N$29: C30.1 THRUST6.P$4 U$13.P$2 U$27.P$2
N$30: U$23.P$3 U$23.P$4 U$27.P$1
N$31: C37.1 U$29.P$6
N$32: 12V_REG.8 12V_REG.9 12V_REG.21 12V_REG.22 C41.2 L2.P$1
N$33: C20.1 U$19.P$6
N$34: U$5.P$1 U$5.P$2 U$19.P$3 U$19.P$4
N$35: R19.1 U$25.AA U$25.AB
N$36: C55.1 THRUST7.P$4 U$16.P$2 U$37.P$2
N$37: U$29.P$3 U$29.P$4 U$37.P$1
N$38: C57.1 U$39.P$6
N$39: C52.1 C58.1 THRUST8.P$4 U$10.P$2 U$40.P$2
N$40: 5V_REG.8 5V_REG.9 5V_REG.21 5V_REG.22 C65.2 L1.P$1
N$41: C23.1 I2C_SHIFT.P$7 I2C_SHIFT.P$8 R12.1
N$42: 5V_REG.20 C42.2 R23.1 R24.2
N$43: 5V_REG.3 C65.1
N$44: 12V_REG.20 C28.2 R15.1 R16.2
N$45: 12V_REG.3 C41.1
N$46: Q1.1 R41.1 R42.1
N$47: U$39.P$3 U$39.P$4 U$40.P$1
N$48: 5V_REG.2 C63.1
N$49: 12V_VOLTAGE.P$1 12V_VOLTAGE.P$2 R25.2
N$50: R37.1 SHORE-FET.TAB SHORE_IN.P$1 U$57.P$2
N$51: C32.2 CPU_ON.P$2 U$45.P$3 U$59.P$1
N$52: C31.1 U$35.P$6
N$53: U$19.P$7 V-THRUST_CURR_ADC.P$4
N$54: 12V_REG.2 C39.1
N$55: U$2.P$3 U$2.P$4 U$20.P$1
N$56: U$35.P$3 U$35.P$4 U$36.P$1
N$57: 5V_CURR_ADC.P$4 U$2.P$7
N$58: R30.2 V-THRUST_VOLTAGE.P$1 V-THRUST_VOLTAGE.P$2
N$59: C32.1 R18.2 U$45.P$2
N$60: 12V_CURR_ADC.P$4 U$35.P$7
N$61: CPU_ON.P$1 R18.1 R21.1 U$59.P$2
N$62: C66.1 R36.1 SHORE-FET.1
N$63: R36.2 R37.2 U$63.P$2
N$64: BATTERY_IN.P$1 R27.1 U$60.P$2 U$61.TAB
N$65: C64.1 R26.1 U$61.1
N$66: R26.2 R27.2 U$62.P$2
N$68: R20.1 RELAY-OUT_LED.P$1
N$69: BATTERY_LED.P$1 R29.1
N$71: 5V_LED.P$1 R31.1
N$72: R32.1 V-THRUST_LED.P$1
N$73: 12V_LED.P$1 R33.1
N$74: 3V3_LED.P$1 R34.1
N$75: R39.1 SHORE_LED.P$1
N$76: FAULT1.2 FAULT1_DISABLE.1 IC4.1 R60.2
N$77: 5V_VOLTAGE.P$1 5V_VOLTAGE.P$2 R35.2
N$78: LED2.A R38.1
N$79: R38.2 U$66.P$3
N$80: 12V_REG.19 R40.1 U$66.P$2
N$81: D1.A N1.3 R42.2
N$82: R43.1 R44.2 U2.2
N$83: C70.1 U2.1
N$84: ON_INDICATOR.A R47.1 R48.1
N$85: R49.1 R50.2 U3.2
N$86: C74.1 U3.1
N$87: IC1.2 R51.2 T_FUSE.2 TH_DISABLE.1
N$88: IC2.2 IC2.7 R52.1
N$89: IC2.6 R52.2 R54.1
N$90: IC2.5 R57.1 R58.2
N$91: R54.2 R55.2 R56.1
N$92: R56.2 WATER.1
N$93: IC2.3 R59.2
N$94: IC2.1 SK_DISABLE1.1
ON_SW: D1.C ON.3 ON.4 ON_SW.1
RELAY-BATT: Q1.2 R29.2 R41.2 U$25.5A U$25.5B U$61.3
RELAY-CTRL: C75.1 R49.2 U3.3 U3.4 U$25.BA U$25.BB
RELAY-SHORE: R39.2 SHORE-FET.3 U$25.2A U$25.2B
RELAY_OUT: 5V_REG.4 5V_REG.13 5V_REG.14 12V_REG.4 12V_REG.13 C4.1 C27.1 C34.1 C38.1 C40.1 C59.+ C60.1 R3.2 R20.2 R40.2 U$1.P$1 U$19.P$1 U$19.P$2 U$25.7A U$25.7B U$50.P$2 U$66.P$1
RX: U$3.1-3
SCL1: 5V_CURR_ADC.P$1 5V_VOLTAGE.P$5 12V_CURR_ADC.P$1 12V_VOLTAGE.P$5 I2C_SHIFT.P$6 R8.1 THRUSTER_CURR_ADC.14 U1.26 U$3.1-9 V-THRUST_CURR_ADC.P$1 V-THRUST_VOLTAGE.P$5
SCL3: U$3.2-7
SCL-3V3: BME280.P$4 DEPTH_SENS.P$1 I2C_SHIFT.P$3 R11.1
SDA1: 5V_CURR_ADC.P$8 5V_VOLTAGE.P$6 12V_CURR_ADC.P$8 12V_VOLTAGE.P$6 I2C_SHIFT.P$5 R7.1 THRUSTER_CURR_ADC.15 U1.27 U$3.1-10 V-THRUST_CURR_ADC.P$8 V-THRUST_VOLTAGE.P$6
SDA3: U$3.2-6
SDA-3V3: BME280.P$3 DEPTH_SENS.P$2 I2C_SHIFT.P$4 R10.1
SK: C73.1 IC3.1 R45.1 R46.2 SK_DISABLE.1
SOFT_KILL: R45.2
SW-5V: 5V_REG.1 C2.1 C42.1 C61.1 C62.P$1 L1.P$2 R23.2 U$2.P$1 U$2.P$2 U$2.P$8
T1_CURR: THRUSTER_CURR_ADC.1 U$4.P$7
T1_PWM: THRUST1.P$2 U1.6
T2_CURR: THRUSTER_CURR_ADC.2 U$8.P$7
T2_PWM: THRUST2.P$2 U1.7
T3_CURR: THRUSTER_CURR_ADC.3 U$11.P$7
T3_PWM: THRUST3.P$2 U1.8
T4_CURR: THRUSTER_CURR_ADC.4 U$14.P$7
T4_PWM: THRUST4.P$2 U1.9
T5_CURR: THRUSTER_CURR_ADC.5 U$17.P$7
T5_PWM: THRUST5.P$2 U1.10
T6_CURR: THRUSTER_CURR_ADC.6 U$23.P$7
T6_PWM: THRUST6.P$2 U1.11
T7_CURR: THRUSTER_CURR_ADC.7 U$29.P$7
T7_PWM: THRUST7.P$2 U1.12
T8_CURR: THRUSTER_CURR_ADC.8 U$39.P$7
T8_PWM: THRUST8.P$2 U1.13
TX: U$3.1-4
V_THRUST: C46.1 C47.1 C49.1 CAMERA1.P$1 CAMERA2.P$1 R30.1 R32.2 U$4.P$1 U$4.P$2 U$5.P$3 U$5.P$4 U$8.P$1 U$8.P$2 U$11.P$1 U$11.P$2 U$14.P$1 U$14.P$2 U$17.P$1 U$17.P$2 U$23.P$1 U$23.P$2 U$29.P$1 U$29.P$2 U$32.P$2 U$33.P$2 U$34.P$2 U$38.P$2 U$39.P$1 U$39.P$2 V-THRUST_OUT.P$1
VCC: IC1.5 IC4.5
VDD: C72.+ C76.+ Q1.3 R47.2 R48.2 U2.5 U2.6 U2.7 U3.5 U3.6 U3.7
WATER: IC1.1 SK_DISABLE1.2